# EAGLE board FLEX_DISPLAY (EAGLE 9.5.2)
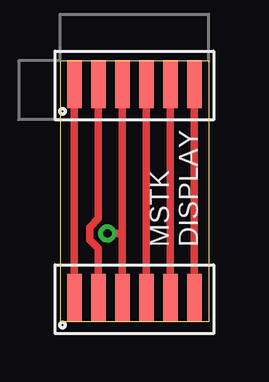
[diagram p0: board, top side]
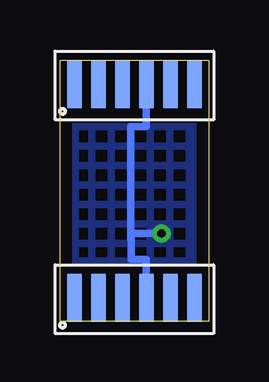
[diagram p1: board, bottom side, seen from below]

Size 6.2 x 10.86 mm. Coordinates in mm from the lower left corner, seen from the top.
Outline: 6.2,10.86 6.2,0 0,0 0,10.86 6.2,10.86
Copper layers (1*16): Top 0.035mm / dielectric 1.5mm / Bottom 0.035mm
Design rules "default *": minimum track width 6mil, minimum drill 0.35mm, track to track 6mil, track to pad 6mil, pad to pad 6mil, via to via 6mil, smd to smd 6mil, copper to edge 20mil, drill to drill 6mil, minimum pad ring 10mil, minimum via ring 8mil, stop-mask expansion 4mil, vias tented up to drill 0mil, thermal gap 10mil

## Footprints (pad centres in the part's own frame; a part is rotated, then mirrored left to right if it is on the bottom)
FLEX6 = smd 0.6 x 2: 1 -2.5,0.25; 2 -1.5,0.25; 3 -0.5,0.25; 4 0.5,0.25; 5 1.5,0.25; 6 2.5,0.25

## Placement (x,y rotation side)
K1  FLEX6  [FLEX6]  3.1,9.65 0 top
K2  FLEX6  [FLEX6]  3.1,0.73 0 top
K3  FLEX6  [FLEX6]  3.1,9.64 0 bottom
K4  FLEX6  [FLEX6]  3.1,0.73 0 bottom

## Library data of the parts
K1-K4 = Flex

## Nets
GND: K1.3 K2.3 K3.4 K4.4
N$1: K1.1 K2.1
N$2: K1.2 K2.2
N$4: K1.4 K2.4
N$5: K1.5 K2.5
N$6: K1.6 K2.6

## Tracks (layer width: path | path; a pad name or v marks a point on that pad's centre or on a via)
GND  (via drill 0.35)
  Top 0.305: K2.3 2.6,3.66 | 2.6,3.66 K3.4 | K3.4 | v1.97,3.66 2.6,3.66
  Bottom 0.305: K3.4 2.6,8.12 3.25,8.12 3.25,3.4 | v1.97,3.66 3.23,3.66 3.23,2.57 2.6,2.57 K4.4
  pour Bottom (hatched): -1.61,8.12 7.02,8.12 7.02,2.53 -1.61,2.53
N$1
  Top 0.305: K2.1 K1.1 | K1.1
N$2
  Top 0.305: K2.2 1.6,3.02 1.24,3.39 1.24,3.91 1.6,4.28 K1.2
N$4
  Top 0.305: K2.4 K1.4 | K1.4
N$5
  Top 0.305: K2.5 K1.5 | K1.5
N$6
  Top 0.305: K2.6 K1.6 | K1.6

## Text on the board
tNames: MSTK / DISPLAY
Document: Stiffener TOP | Stiffener TOP
tDocu: Stiffener TOP